# Altium PCB ProPrj_HTXStudio_OneHanded_Keyboard.PcbDoc (part 6 of 11)
Units mm, origin at the board's own origin, x right, y up, seen from the top; angles counter-clockwise.
Board outline 152.4 x 101.6 mm, 20 copper layers (F.Cu, F.Mask, B.Cu, B.Mask, In1.Cu, F.SilkS, In2.Cu, B.SilkS, F.Adhes, B.Adhes, F.Paste, B.Paste, Dwgs.User, Cmts.User, Eco1.User, Eco2.User, Edge.Cuts, Margin, B.CrtYd, F.CrtYd); 269 components, 0 nets, 747 pads, 1168 vias.
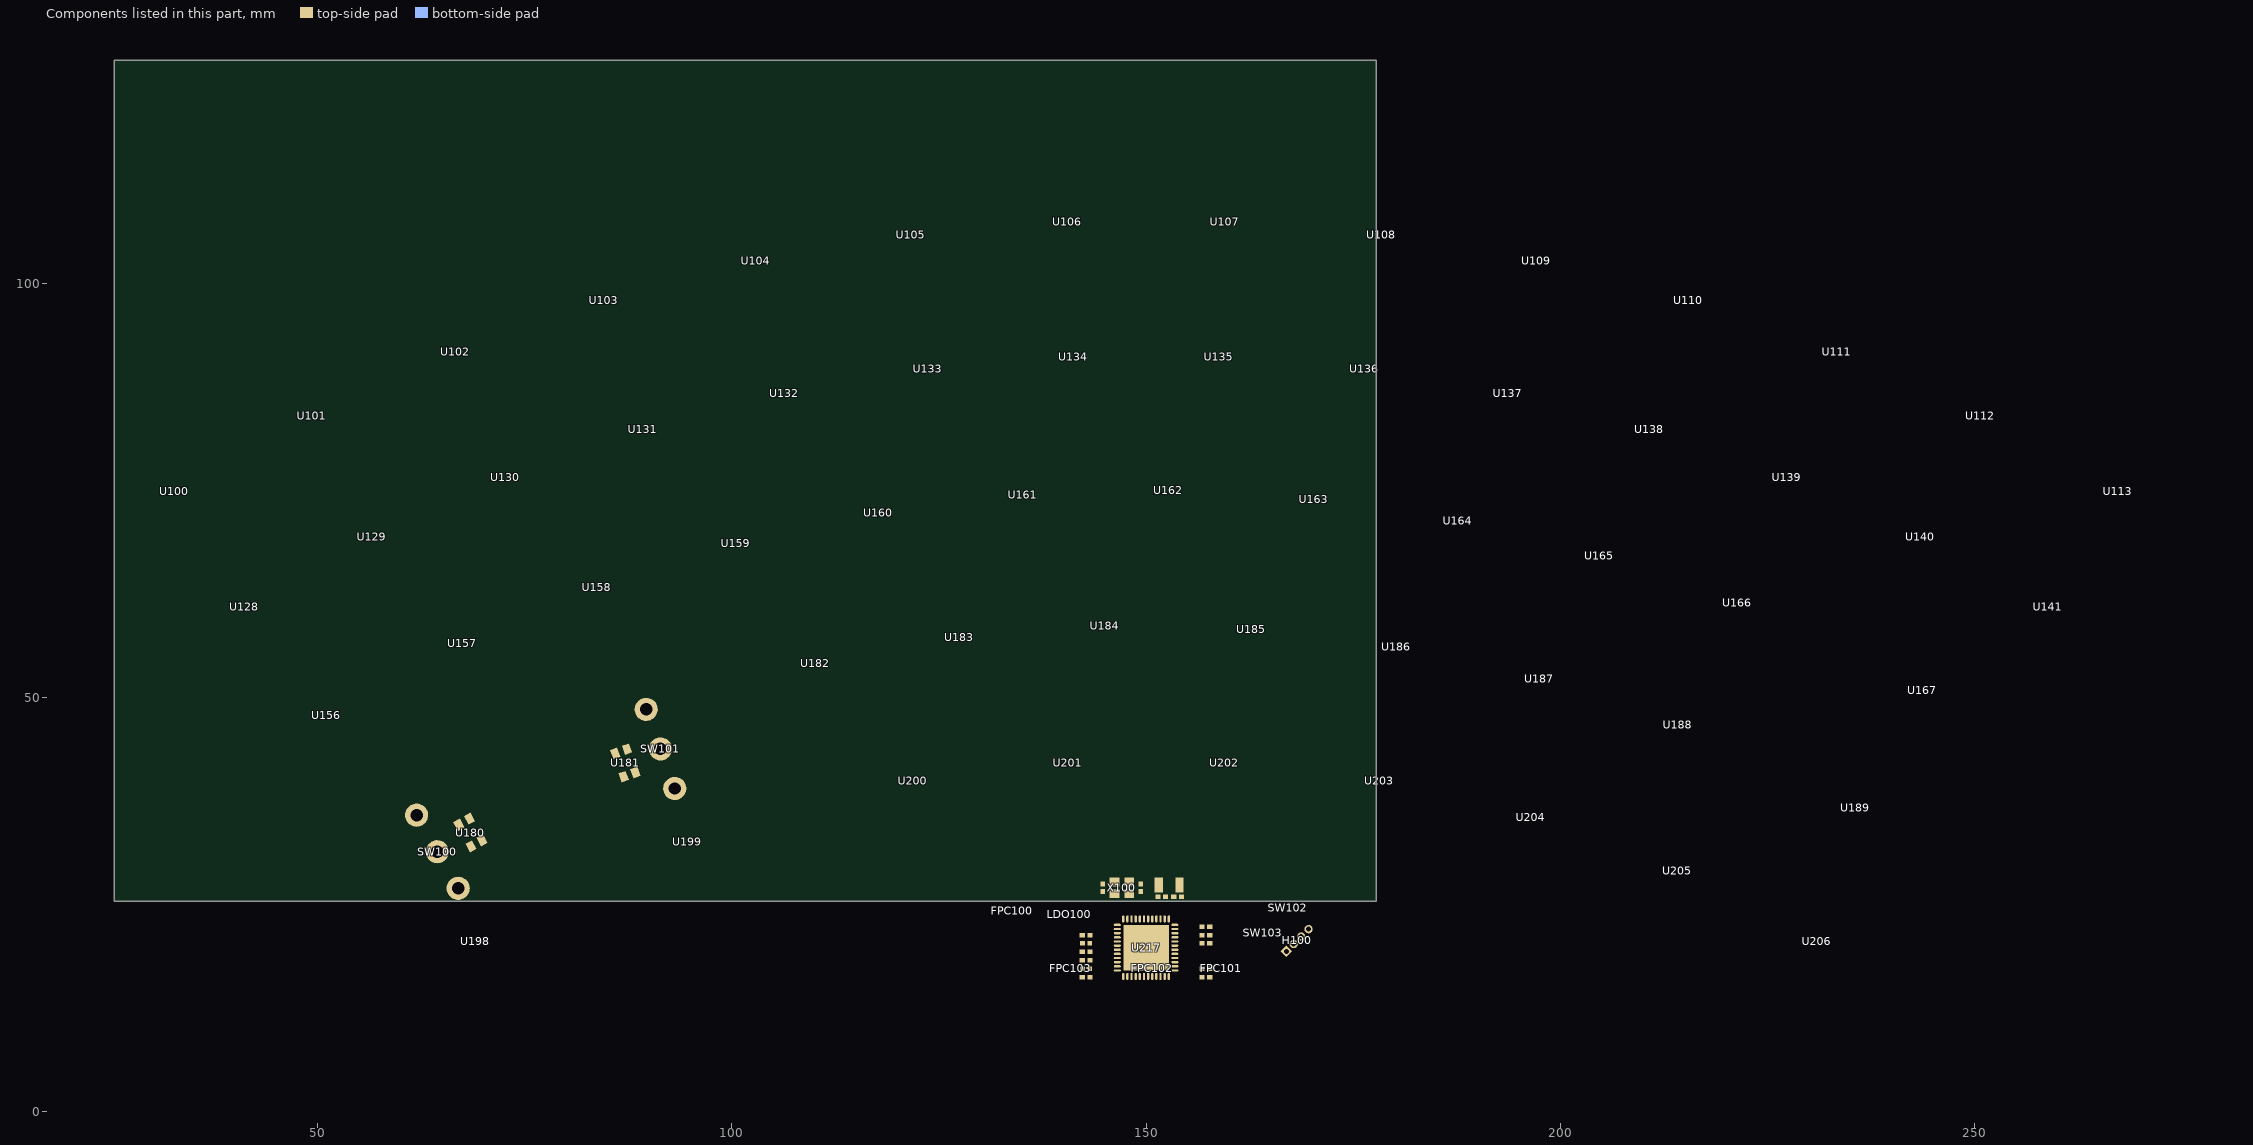
[diagram p18: the components of this part, seen from the top]

## Design rules (kind name [scope] priority, off if disabled: settings) (continued)
PolygonConnect Polygon_B.Cu--21_ConnectDirect [IsNamedPolygon('B.Cu--21') vs IsVia] p1009: connectstyle=Direct reliefconductorwidth=0.254 reliefentries=4 polygonreliefangle="90 Angle" airgapwidth=0.254
PolygonConnect Polygon_B.Cu--21_ConnectRelief45 [IsNamedPolygon('B.Cu--21') vs (IsThruPin or IsSMTPin) and (PadShape_AllLayers = 'Round')] p1010: connectstyle=Relief reliefconductorwidth=0.254 reliefentries=4 polygonreliefangle="45 Angle" airgapwidth=0.254
PolygonConnect Polygon_B.Cu--21_ConnectRelief90 [IsNamedPolygon('B.Cu--21') vs (IsThruPin or IsSMTPin) and (PadShape_AllLayers <> 'Round')] p1011: connectstyle=Relief reliefconductorwidth=0.254 reliefentries=4 polygonreliefangle="90 Angle" airgapwidth=0.254
PolygonConnect Polygon_B.Cu--20_ConnectDirect [IsNamedPolygon('B.Cu--20') vs IsVia] p1012: connectstyle=Direct reliefconductorwidth=0.254 reliefentries=4 polygonreliefangle="90 Angle" airgapwidth=0.254
PolygonConnect Polygon_B.Cu--20_ConnectRelief45 [IsNamedPolygon('B.Cu--20') vs (IsThruPin or IsSMTPin) and (PadShape_AllLayers = 'Round')] p1013: connectstyle=Relief reliefconductorwidth=0.254 reliefentries=4 polygonreliefangle="45 Angle" airgapwidth=0.254
PolygonConnect Polygon_B.Cu--20_ConnectRelief90 [IsNamedPolygon('B.Cu--20') vs (IsThruPin or IsSMTPin) and (PadShape_AllLayers <> 'Round')] p1014: connectstyle=Relief reliefconductorwidth=0.254 reliefentries=4 polygonreliefangle="90 Angle" airgapwidth=0.254
PolygonConnect Polygon_B.Cu--19_ConnectDirect [IsNamedPolygon('B.Cu--19') vs IsVia] p1015: connectstyle=Direct reliefconductorwidth=0.254 reliefentries=4 polygonreliefangle="90 Angle" airgapwidth=0.254
PolygonConnect Polygon_B.Cu--19_ConnectRelief45 [IsNamedPolygon('B.Cu--19') vs (IsThruPin or IsSMTPin) and (PadShape_AllLayers = 'Round')] p1016: connectstyle=Relief reliefconductorwidth=0.254 reliefentries=4 polygonreliefangle="45 Angle" airgapwidth=0.254
PolygonConnect Polygon_B.Cu--19_ConnectRelief90 [IsNamedPolygon('B.Cu--19') vs (IsThruPin or IsSMTPin) and (PadShape_AllLayers <> 'Round')] p1017: connectstyle=Relief reliefconductorwidth=0.254 reliefentries=4 polygonreliefangle="90 Angle" airgapwidth=0.254
PolygonConnect Polygon_B.Cu--18_ConnectDirect [IsNamedPolygon('B.Cu--18') vs IsVia] p1018: connectstyle=Direct reliefconductorwidth=0.254 reliefentries=4 polygonreliefangle="90 Angle" airgapwidth=0.254
PolygonConnect Polygon_B.Cu--18_ConnectRelief45 [IsNamedPolygon('B.Cu--18') vs (IsThruPin or IsSMTPin) and (PadShape_AllLayers = 'Round')] p1019: connectstyle=Relief reliefconductorwidth=0.254 reliefentries=4 polygonreliefangle="45 Angle" airgapwidth=0.254
PolygonConnect Polygon_B.Cu--18_ConnectRelief90 [IsNamedPolygon('B.Cu--18') vs (IsThruPin or IsSMTPin) and (PadShape_AllLayers <> 'Round')] p1020: connectstyle=Relief reliefconductorwidth=0.254 reliefentries=4 polygonreliefangle="90 Angle" airgapwidth=0.254
PolygonConnect Polygon_B.Cu--17_ConnectDirect [IsNamedPolygon('B.Cu--17') vs IsVia] p1021: connectstyle=Direct reliefconductorwidth=0.254 reliefentries=4 polygonreliefangle="90 Angle" airgapwidth=0.254
PolygonConnect Polygon_B.Cu--17_ConnectRelief45 [IsNamedPolygon('B.Cu--17') vs (IsThruPin or IsSMTPin) and (PadShape_AllLayers = 'Round')] p1022: connectstyle=Relief reliefconductorwidth=0.254 reliefentries=4 polygonreliefangle="45 Angle" airgapwidth=0.254
PolygonConnect Polygon_B.Cu--17_ConnectRelief90 [IsNamedPolygon('B.Cu--17') vs (IsThruPin or IsSMTPin) and (PadShape_AllLayers <> 'Round')] p1023: connectstyle=Relief reliefconductorwidth=0.254 reliefentries=4 polygonreliefangle="90 Angle" airgapwidth=0.254
PolygonConnect Polygon_B.Cu--16_ConnectDirect [IsNamedPolygon('B.Cu--16') vs IsVia] p1024: connectstyle=Direct reliefconductorwidth=0.254 reliefentries=4 polygonreliefangle="90 Angle" airgapwidth=0.254
PolygonConnect Polygon_B.Cu--16_ConnectRelief45 [IsNamedPolygon('B.Cu--16') vs (IsThruPin or IsSMTPin) and (PadShape_AllLayers = 'Round')] p1025: connectstyle=Relief reliefconductorwidth=0.254 reliefentries=4 polygonreliefangle="45 Angle" airgapwidth=0.254
PolygonConnect Polygon_B.Cu--16_ConnectRelief90 [IsNamedPolygon('B.Cu--16') vs (IsThruPin or IsSMTPin) and (PadShape_AllLayers <> 'Round')] p1026: connectstyle=Relief reliefconductorwidth=0.254 reliefentries=4 polygonreliefangle="90 Angle" airgapwidth=0.254
PolygonConnect Polygon_B.Cu--15_ConnectDirect [IsNamedPolygon('B.Cu--15') vs IsVia] p1027: connectstyle=Direct reliefconductorwidth=0.254 reliefentries=4 polygonreliefangle="90 Angle" airgapwidth=0.254
PolygonConnect Polygon_B.Cu--15_ConnectRelief45 [IsNamedPolygon('B.Cu--15') vs (IsThruPin or IsSMTPin) and (PadShape_AllLayers = 'Round')] p1028: connectstyle=Relief reliefconductorwidth=0.254 reliefentries=4 polygonreliefangle="45 Angle" airgapwidth=0.254
PolygonConnect Polygon_B.Cu--15_ConnectRelief90 [IsNamedPolygon('B.Cu--15') vs (IsThruPin or IsSMTPin) and (PadShape_AllLayers <> 'Round')] p1029: connectstyle=Relief reliefconductorwidth=0.254 reliefentries=4 polygonreliefangle="90 Angle" airgapwidth=0.254
PolygonConnect Polygon_B.Cu--14_ConnectDirect [IsNamedPolygon('B.Cu--14') vs IsVia] p1030: connectstyle=Direct reliefconductorwidth=0.254 reliefentries=4 polygonreliefangle="90 Angle" airgapwidth=0.254
PolygonConnect Polygon_B.Cu--14_ConnectRelief45 [IsNamedPolygon('B.Cu--14') vs (IsThruPin or IsSMTPin) and (PadShape_AllLayers = 'Round')] p1031: connectstyle=Relief reliefconductorwidth=0.254 reliefentries=4 polygonreliefangle="45 Angle" airgapwidth=0.254
PolygonConnect Polygon_B.Cu--14_ConnectRelief90 [IsNamedPolygon('B.Cu--14') vs (IsThruPin or IsSMTPin) and (PadShape_AllLayers <> 'Round')] p1032: connectstyle=Relief reliefconductorwidth=0.254 reliefentries=4 polygonreliefangle="90 Angle" airgapwidth=0.254
PolygonConnect Polygon_B.Cu--13_ConnectDirect [IsNamedPolygon('B.Cu--13') vs IsVia] p1033: connectstyle=Direct reliefconductorwidth=0.254 reliefentries=4 polygonreliefangle="90 Angle" airgapwidth=0.254
PolygonConnect Polygon_B.Cu--13_ConnectRelief45 [IsNamedPolygon('B.Cu--13') vs (IsThruPin or IsSMTPin) and (PadShape_AllLayers = 'Round')] p1034: connectstyle=Relief reliefconductorwidth=0.254 reliefentries=4 polygonreliefangle="45 Angle" airgapwidth=0.254
PolygonConnect Polygon_B.Cu--13_ConnectRelief90 [IsNamedPolygon('B.Cu--13') vs (IsThruPin or IsSMTPin) and (PadShape_AllLayers <> 'Round')] p1035: connectstyle=Relief reliefconductorwidth=0.254 reliefentries=4 polygonreliefangle="90 Angle" airgapwidth=0.254
PolygonConnect Polygon_B.Cu--12_ConnectDirect [IsNamedPolygon('B.Cu--12') vs IsVia] p1036: connectstyle=Direct reliefconductorwidth=0.254 reliefentries=4 polygonreliefangle="90 Angle" airgapwidth=0.254
PolygonConnect Polygon_B.Cu--12_ConnectRelief45 [IsNamedPolygon('B.Cu--12') vs (IsThruPin or IsSMTPin) and (PadShape_AllLayers = 'Round')] p1037: connectstyle=Relief reliefconductorwidth=0.254 reliefentries=4 polygonreliefangle="45 Angle" airgapwidth=0.254
PolygonConnect Polygon_B.Cu--12_ConnectRelief90 [IsNamedPolygon('B.Cu--12') vs (IsThruPin or IsSMTPin) and (PadShape_AllLayers <> 'Round')] p1038: connectstyle=Relief reliefconductorwidth=0.254 reliefentries=4 polygonreliefangle="90 Angle" airgapwidth=0.254
PolygonConnect Polygon_B.Cu--11_ConnectDirect [IsNamedPolygon('B.Cu--11') vs IsVia] p1039: connectstyle=Direct reliefconductorwidth=0.254 reliefentries=4 polygonreliefangle="90 Angle" airgapwidth=0.254
PolygonConnect Polygon_B.Cu--11_ConnectRelief45 [IsNamedPolygon('B.Cu--11') vs (IsThruPin or IsSMTPin) and (PadShape_AllLayers = 'Round')] p1040: connectstyle=Relief reliefconductorwidth=0.254 reliefentries=4 polygonreliefangle="45 Angle" airgapwidth=0.254
PolygonConnect Polygon_B.Cu--11_ConnectRelief90 [IsNamedPolygon('B.Cu--11') vs (IsThruPin or IsSMTPin) and (PadShape_AllLayers <> 'Round')] p1041: connectstyle=Relief reliefconductorwidth=0.254 reliefentries=4 polygonreliefangle="90 Angle" airgapwidth=0.254
PolygonConnect Polygon_B.Cu--10_ConnectDirect [IsNamedPolygon('B.Cu--10') vs IsVia] p1042: connectstyle=Direct reliefconductorwidth=0.254 reliefentries=4 polygonreliefangle="90 Angle" airgapwidth=0.254
PolygonConnect Polygon_B.Cu--10_ConnectRelief45 [IsNamedPolygon('B.Cu--10') vs (IsThruPin or IsSMTPin) and (PadShape_AllLayers = 'Round')] p1043: connectstyle=Relief reliefconductorwidth=0.254 reliefentries=4 polygonreliefangle="45 Angle" airgapwidth=0.254
PolygonConnect Polygon_B.Cu--10_ConnectRelief90 [IsNamedPolygon('B.Cu--10') vs (IsThruPin or IsSMTPin) and (PadShape_AllLayers <> 'Round')] p1044: connectstyle=Relief reliefconductorwidth=0.254 reliefentries=4 polygonreliefangle="90 Angle" airgapwidth=0.254
PolygonConnect Polygon_B.Cu--9_ConnectDirect [IsNamedPolygon('B.Cu--9') vs IsVia] p1045: connectstyle=Direct reliefconductorwidth=0.254 reliefentries=4 polygonreliefangle="90 Angle" airgapwidth=0.254
PolygonConnect Polygon_B.Cu--9_ConnectRelief45 [IsNamedPolygon('B.Cu--9') vs (IsThruPin or IsSMTPin) and (PadShape_AllLayers = 'Round')] p1046: connectstyle=Relief reliefconductorwidth=0.254 reliefentries=4 polygonreliefangle="45 Angle" airgapwidth=0.254
PolygonConnect Polygon_B.Cu--9_ConnectRelief90 [IsNamedPolygon('B.Cu--9') vs (IsThruPin or IsSMTPin) and (PadShape_AllLayers <> 'Round')] p1047: connectstyle=Relief reliefconductorwidth=0.254 reliefentries=4 polygonreliefangle="90 Angle" airgapwidth=0.254
PolygonConnect Polygon_B.Cu--8_ConnectDirect [IsNamedPolygon('B.Cu--8') vs IsVia] p1048: connectstyle=Direct reliefconductorwidth=0.254 reliefentries=4 polygonreliefangle="90 Angle" airgapwidth=0.254
PolygonConnect Polygon_B.Cu--8_ConnectRelief45 [IsNamedPolygon('B.Cu--8') vs (IsThruPin or IsSMTPin) and (PadShape_AllLayers = 'Round')] p1049: connectstyle=Relief reliefconductorwidth=0.254 reliefentries=4 polygonreliefangle="45 Angle" airgapwidth=0.254
PolygonConnect Polygon_B.Cu--8_ConnectRelief90 [IsNamedPolygon('B.Cu--8') vs (IsThruPin or IsSMTPin) and (PadShape_AllLayers <> 'Round')] p1050: connectstyle=Relief reliefconductorwidth=0.254 reliefentries=4 polygonreliefangle="90 Angle" airgapwidth=0.254
PolygonConnect Polygon_B.Cu--7_ConnectDirect [IsNamedPolygon('B.Cu--7') vs IsVia] p1051: connectstyle=Direct reliefconductorwidth=0.254 reliefentries=4 polygonreliefangle="90 Angle" airgapwidth=0.254
PolygonConnect Polygon_B.Cu--7_ConnectRelief45 [IsNamedPolygon('B.Cu--7') vs (IsThruPin or IsSMTPin) and (PadShape_AllLayers = 'Round')] p1052: connectstyle=Relief reliefconductorwidth=0.254 reliefentries=4 polygonreliefangle="45 Angle" airgapwidth=0.254
PolygonConnect Polygon_B.Cu--7_ConnectRelief90 [IsNamedPolygon('B.Cu--7') vs (IsThruPin or IsSMTPin) and (PadShape_AllLayers <> 'Round')] p1053: connectstyle=Relief reliefconductorwidth=0.254 reliefentries=4 polygonreliefangle="90 Angle" airgapwidth=0.254
PolygonConnect Polygon_B.Cu--6_ConnectDirect [IsNamedPolygon('B.Cu--6') vs IsVia] p1054: connectstyle=Direct reliefconductorwidth=0.254 reliefentries=4 polygonreliefangle="90 Angle" airgapwidth=0.254
PolygonConnect Polygon_B.Cu--6_ConnectRelief45 [IsNamedPolygon('B.Cu--6') vs (IsThruPin or IsSMTPin) and (PadShape_AllLayers = 'Round')] p1055: connectstyle=Relief reliefconductorwidth=0.254 reliefentries=4 polygonreliefangle="45 Angle" airgapwidth=0.254
PolygonConnect Polygon_B.Cu--6_ConnectRelief90 [IsNamedPolygon('B.Cu--6') vs (IsThruPin or IsSMTPin) and (PadShape_AllLayers <> 'Round')] p1056: connectstyle=Relief reliefconductorwidth=0.254 reliefentries=4 polygonreliefangle="90 Angle" airgapwidth=0.254
PolygonConnect Polygon_B.Cu--5_ConnectDirect [IsNamedPolygon('B.Cu--5') vs IsVia] p1057: connectstyle=Direct reliefconductorwidth=0.254 reliefentries=4 polygonreliefangle="90 Angle" airgapwidth=0.254
PolygonConnect Polygon_B.Cu--5_ConnectRelief45 [IsNamedPolygon('B.Cu--5') vs (IsThruPin or IsSMTPin) and (PadShape_AllLayers = 'Round')] p1058: connectstyle=Relief reliefconductorwidth=0.254 reliefentries=4 polygonreliefangle="45 Angle" airgapwidth=0.254
PolygonConnect Polygon_B.Cu--5_ConnectRelief90 [IsNamedPolygon('B.Cu--5') vs (IsThruPin or IsSMTPin) and (PadShape_AllLayers <> 'Round')] p1059: connectstyle=Relief reliefconductorwidth=0.254 reliefentries=4 polygonreliefangle="90 Angle" airgapwidth=0.254
PolygonConnect Polygon_B.Cu--4_ConnectDirect [IsNamedPolygon('B.Cu--4') vs IsVia] p1060: connectstyle=Direct reliefconductorwidth=0.254 reliefentries=4 polygonreliefangle="90 Angle" airgapwidth=0.254
PolygonConnect Polygon_B.Cu--4_ConnectRelief45 [IsNamedPolygon('B.Cu--4') vs (IsThruPin or IsSMTPin) and (PadShape_AllLayers = 'Round')] p1061: connectstyle=Relief reliefconductorwidth=0.254 reliefentries=4 polygonreliefangle="45 Angle" airgapwidth=0.254
PolygonConnect Polygon_B.Cu--4_ConnectRelief90 [IsNamedPolygon('B.Cu--4') vs (IsThruPin or IsSMTPin) and (PadShape_AllLayers <> 'Round')] p1062: connectstyle=Relief reliefconductorwidth=0.254 reliefentries=4 polygonreliefangle="90 Angle" airgapwidth=0.254
PolygonConnect Polygon_B.Cu--3_ConnectDirect [IsNamedPolygon('B.Cu--3') vs IsVia] p1063: connectstyle=Direct reliefconductorwidth=0.254 reliefentries=4 polygonreliefangle="90 Angle" airgapwidth=0.254
PolygonConnect Polygon_B.Cu--3_ConnectRelief45 [IsNamedPolygon('B.Cu--3') vs (IsThruPin or IsSMTPin) and (PadShape_AllLayers = 'Round')] p1064: connectstyle=Relief reliefconductorwidth=0.254 reliefentries=4 polygonreliefangle="45 Angle" airgapwidth=0.254
PolygonConnect Polygon_B.Cu--3_ConnectRelief90 [IsNamedPolygon('B.Cu--3') vs (IsThruPin or IsSMTPin) and (PadShape_AllLayers <> 'Round')] p1065: connectstyle=Relief reliefconductorwidth=0.254 reliefentries=4 polygonreliefangle="90 Angle" airgapwidth=0.254
PolygonConnect Polygon_B.Cu--2_ConnectDirect [IsNamedPolygon('B.Cu--2') vs IsVia] p1066: connectstyle=Direct reliefconductorwidth=0.254 reliefentries=4 polygonreliefangle="90 Angle" airgapwidth=0.254
PolygonConnect Polygon_B.Cu--2_ConnectRelief45 [IsNamedPolygon('B.Cu--2') vs (IsThruPin or IsSMTPin) and (PadShape_AllLayers = 'Round')] p1067: connectstyle=Relief reliefconductorwidth=0.254 reliefentries=4 polygonreliefangle="45 Angle" airgapwidth=0.254
PolygonConnect Polygon_B.Cu--2_ConnectRelief90 [IsNamedPolygon('B.Cu--2') vs (IsThruPin or IsSMTPin) and (PadShape_AllLayers <> 'Round')] p1068: connectstyle=Relief reliefconductorwidth=0.254 reliefentries=4 polygonreliefangle="90 Angle" airgapwidth=0.254
PolygonConnect Polygon_B.Cu--1_ConnectDirect [IsNamedPolygon('B.Cu--1') vs IsVia] p1069: connectstyle=Direct reliefconductorwidth=0.254 reliefentries=4 polygonreliefangle="90 Angle" airgapwidth=0.254
PolygonConnect Polygon_B.Cu--1_ConnectRelief45 [IsNamedPolygon('B.Cu--1') vs (IsThruPin or IsSMTPin) and (PadShape_AllLayers = 'Round')] p1070: connectstyle=Relief reliefconductorwidth=0.254 reliefentries=4 polygonreliefangle="45 Angle" airgapwidth=0.254
PolygonConnect Polygon_B.Cu--1_ConnectRelief90 [IsNamedPolygon('B.Cu--1') vs (IsThruPin or IsSMTPin) and (PadShape_AllLayers <> 'Round')] p1071: connectstyle=Relief reliefconductorwidth=0.254 reliefentries=4 polygonreliefangle="90 Angle" airgapwidth=0.254
PolygonConnect Polygon_B.Cu-_ConnectDirect [IsNamedPolygon('B.Cu-') vs IsVia] p1072: connectstyle=Direct reliefconductorwidth=0.254 reliefentries=4 polygonreliefangle="90 Angle" airgapwidth=0.254
PolygonConnect Polygon_B.Cu-_ConnectRelief45 [IsNamedPolygon('B.Cu-') vs (IsThruPin or IsSMTPin) and (PadShape_AllLayers = 'Round')] p1073: connectstyle=Relief reliefconductorwidth=0.254 reliefentries=4 polygonreliefangle="45 Angle" airgapwidth=0.254
PolygonConnect Polygon_B.Cu-_ConnectRelief90 [IsNamedPolygon('B.Cu-') vs (IsThruPin or IsSMTPin) and (PadShape_AllLayers <> 'Round')] p1074: connectstyle=Relief reliefconductorwidth=0.254 reliefentries=4 polygonreliefangle="90 Angle" airgapwidth=0.254
PolygonConnect Polygon_F.Cu--49_ConnectDirect [IsNamedPolygon('F.Cu--49') vs IsVia] p1075: connectstyle=Direct reliefconductorwidth=0.254 reliefentries=4 polygonreliefangle="90 Angle" airgapwidth=0.254
PolygonConnect Polygon_F.Cu--49_ConnectRelief45 [IsNamedPolygon('F.Cu--49') vs (IsThruPin or IsSMTPin) and (PadShape_AllLayers = 'Round')] p1076: connectstyle=Relief reliefconductorwidth=0.254 reliefentries=4 polygonreliefangle="45 Angle" airgapwidth=0.254
PolygonConnect Polygon_F.Cu--49_ConnectRelief90 [IsNamedPolygon('F.Cu--49') vs (IsThruPin or IsSMTPin) and (PadShape_AllLayers <> 'Round')] p1077: connectstyle=Relief reliefconductorwidth=0.254 reliefentries=4 polygonreliefangle="90 Angle" airgapwidth=0.254
PolygonConnect Polygon_F.Cu--48_ConnectDirect [IsNamedPolygon('F.Cu--48') vs IsVia] p1078: connectstyle=Direct reliefconductorwidth=0.254 reliefentries=4 polygonreliefangle="90 Angle" airgapwidth=0.254
PolygonConnect Polygon_F.Cu--48_ConnectRelief45 [IsNamedPolygon('F.Cu--48') vs (IsThruPin or IsSMTPin) and (PadShape_AllLayers = 'Round')] p1079: connectstyle=Relief reliefconductorwidth=0.254 reliefentries=4 polygonreliefangle="45 Angle" airgapwidth=0.254
PolygonConnect Polygon_F.Cu--48_ConnectRelief90 [IsNamedPolygon('F.Cu--48') vs (IsThruPin or IsSMTPin) and (PadShape_AllLayers <> 'Round')] p1080: connectstyle=Relief reliefconductorwidth=0.254 reliefentries=4 polygonreliefangle="90 Angle" airgapwidth=0.254
PolygonConnect Polygon_F.Cu--47_ConnectDirect [IsNamedPolygon('F.Cu--47') vs IsVia] p1081: connectstyle=Direct reliefconductorwidth=0.254 reliefentries=4 polygonreliefangle="90 Angle" airgapwidth=0.254
PolygonConnect Polygon_F.Cu--47_ConnectRelief45 [IsNamedPolygon('F.Cu--47') vs (IsThruPin or IsSMTPin) and (PadShape_AllLayers = 'Round')] p1082: connectstyle=Relief reliefconductorwidth=0.254 reliefentries=4 polygonreliefangle="45 Angle" airgapwidth=0.254
PolygonConnect Polygon_F.Cu--47_ConnectRelief90 [IsNamedPolygon('F.Cu--47') vs (IsThruPin or IsSMTPin) and (PadShape_AllLayers <> 'Round')] p1083: connectstyle=Relief reliefconductorwidth=0.254 reliefentries=4 polygonreliefangle="90 Angle" airgapwidth=0.254
PolygonConnect Polygon_F.Cu--46_ConnectDirect [IsNamedPolygon('F.Cu--46') vs IsVia] p1084: connectstyle=Direct reliefconductorwidth=0.254 reliefentries=4 polygonreliefangle="90 Angle" airgapwidth=0.254
PolygonConnect Polygon_F.Cu--46_ConnectRelief45 [IsNamedPolygon('F.Cu--46') vs (IsThruPin or IsSMTPin) and (PadShape_AllLayers = 'Round')] p1085: connectstyle=Relief reliefconductorwidth=0.254 reliefentries=4 polygonreliefangle="45 Angle" airgapwidth=0.254
PolygonConnect Polygon_F.Cu--46_ConnectRelief90 [IsNamedPolygon('F.Cu--46') vs (IsThruPin or IsSMTPin) and (PadShape_AllLayers <> 'Round')] p1086: connectstyle=Relief reliefconductorwidth=0.254 reliefentries=4 polygonreliefangle="90 Angle" airgapwidth=0.254
PolygonConnect Polygon_F.Cu--45_ConnectDirect [IsNamedPolygon('F.Cu--45') vs IsVia] p1087: connectstyle=Direct reliefconductorwidth=0.254 reliefentries=4 polygonreliefangle="90 Angle" airgapwidth=0.254
PolygonConnect Polygon_F.Cu--45_ConnectRelief45 [IsNamedPolygon('F.Cu--45') vs (IsThruPin or IsSMTPin) and (PadShape_AllLayers = 'Round')] p1088: connectstyle=Relief reliefconductorwidth=0.254 reliefentries=4 polygonreliefangle="45 Angle" airgapwidth=0.254
PolygonConnect Polygon_F.Cu--45_ConnectRelief90 [IsNamedPolygon('F.Cu--45') vs (IsThruPin or IsSMTPin) and (PadShape_AllLayers <> 'Round')] p1089: connectstyle=Relief reliefconductorwidth=0.254 reliefentries=4 polygonreliefangle="90 Angle" airgapwidth=0.254
PolygonConnect Polygon_F.Cu--44_ConnectDirect [IsNamedPolygon('F.Cu--44') vs IsVia] p1090: connectstyle=Direct reliefconductorwidth=0.254 reliefentries=4 polygonreliefangle="90 Angle" airgapwidth=0.254
PolygonConnect Polygon_F.Cu--44_ConnectRelief45 [IsNamedPolygon('F.Cu--44') vs (IsThruPin or IsSMTPin) and (PadShape_AllLayers = 'Round')] p1091: connectstyle=Relief reliefconductorwidth=0.254 reliefentries=4 polygonreliefangle="45 Angle" airgapwidth=0.254
PolygonConnect Polygon_F.Cu--44_ConnectRelief90 [IsNamedPolygon('F.Cu--44') vs (IsThruPin or IsSMTPin) and (PadShape_AllLayers <> 'Round')] p1092: connectstyle=Relief reliefconductorwidth=0.254 reliefentries=4 polygonreliefangle="90 Angle" airgapwidth=0.254
PolygonConnect Polygon_F.Cu--43_ConnectDirect [IsNamedPolygon('F.Cu--43') vs IsVia] p1093: connectstyle=Direct reliefconductorwidth=0.254 reliefentries=4 polygonreliefangle="90 Angle" airgapwidth=0.254
PolygonConnect Polygon_F.Cu--43_ConnectRelief45 [IsNamedPolygon('F.Cu--43') vs (IsThruPin or IsSMTPin) and (PadShape_AllLayers = 'Round')] p1094: connectstyle=Relief reliefconductorwidth=0.254 reliefentries=4 polygonreliefangle="45 Angle" airgapwidth=0.254
PolygonConnect Polygon_F.Cu--43_ConnectRelief90 [IsNamedPolygon('F.Cu--43') vs (IsThruPin or IsSMTPin) and (PadShape_AllLayers <> 'Round')] p1095: connectstyle=Relief reliefconductorwidth=0.254 reliefentries=4 polygonreliefangle="90 Angle" airgapwidth=0.254
PolygonConnect Polygon_F.Cu--42_ConnectDirect [IsNamedPolygon('F.Cu--42') vs IsVia] p1096: connectstyle=Direct reliefconductorwidth=0.254 reliefentries=4 polygonreliefangle="90 Angle" airgapwidth=0.254
PolygonConnect Polygon_F.Cu--42_ConnectRelief45 [IsNamedPolygon('F.Cu--42') vs (IsThruPin or IsSMTPin) and (PadShape_AllLayers = 'Round')] p1097: connectstyle=Relief reliefconductorwidth=0.254 reliefentries=4 polygonreliefangle="45 Angle" airgapwidth=0.254
PolygonConnect Polygon_F.Cu--42_ConnectRelief90 [IsNamedPolygon('F.Cu--42') vs (IsThruPin or IsSMTPin) and (PadShape_AllLayers <> 'Round')] p1098: connectstyle=Relief reliefconductorwidth=0.254 reliefentries=4 polygonreliefangle="90 Angle" airgapwidth=0.254
PolygonConnect Polygon_F.Cu--41_ConnectDirect [IsNamedPolygon('F.Cu--41') vs IsVia] p1099: connectstyle=Direct reliefconductorwidth=0.254 reliefentries=4 polygonreliefangle="90 Angle" airgapwidth=0.254
PolygonConnect Polygon_F.Cu--41_ConnectRelief45 [IsNamedPolygon('F.Cu--41') vs (IsThruPin or IsSMTPin) and (PadShape_AllLayers = 'Round')] p1100: connectstyle=Relief reliefconductorwidth=0.254 reliefentries=4 polygonreliefangle="45 Angle" airgapwidth=0.254
PolygonConnect Polygon_F.Cu--41_ConnectRelief90 [IsNamedPolygon('F.Cu--41') vs (IsThruPin or IsSMTPin) and (PadShape_AllLayers <> 'Round')] p1101: connectstyle=Relief reliefconductorwidth=0.254 reliefentries=4 polygonreliefangle="90 Angle" airgapwidth=0.254
PolygonConnect Polygon_F.Cu--40_ConnectDirect [IsNamedPolygon('F.Cu--40') vs IsVia] p1102: connectstyle=Direct reliefconductorwidth=0.254 reliefentries=4 polygonreliefangle="90 Angle" airgapwidth=0.254
PolygonConnect Polygon_F.Cu--40_ConnectRelief45 [IsNamedPolygon('F.Cu--40') vs (IsThruPin or IsSMTPin) and (PadShape_AllLayers = 'Round')] p1103: connectstyle=Relief reliefconductorwidth=0.254 reliefentries=4 polygonreliefangle="45 Angle" airgapwidth=0.254
PolygonConnect Polygon_F.Cu--40_ConnectRelief90 [IsNamedPolygon('F.Cu--40') vs (IsThruPin or IsSMTPin) and (PadShape_AllLayers <> 'Round')] p1104: connectstyle=Relief reliefconductorwidth=0.254 reliefentries=4 polygonreliefangle="90 Angle" airgapwidth=0.254
PolygonConnect Polygon_F.Cu--39_ConnectDirect [IsNamedPolygon('F.Cu--39') vs IsVia] p1105: connectstyle=Direct reliefconductorwidth=0.254 reliefentries=4 polygonreliefangle="90 Angle" airgapwidth=0.254
PolygonConnect Polygon_F.Cu--39_ConnectRelief45 [IsNamedPolygon('F.Cu--39') vs (IsThruPin or IsSMTPin) and (PadShape_AllLayers = 'Round')] p1106: connectstyle=Relief reliefconductorwidth=0.254 reliefentries=4 polygonreliefangle="45 Angle" airgapwidth=0.254
PolygonConnect Polygon_F.Cu--39_ConnectRelief90 [IsNamedPolygon('F.Cu--39') vs (IsThruPin or IsSMTPin) and (PadShape_AllLayers <> 'Round')] p1107: connectstyle=Relief reliefconductorwidth=0.254 reliefentries=4 polygonreliefangle="90 Angle" airgapwidth=0.254
PolygonConnect Polygon_F.Cu--38_ConnectDirect [IsNamedPolygon('F.Cu--38') vs IsVia] p1108: connectstyle=Direct reliefconductorwidth=0.254 reliefentries=4 polygonreliefangle="90 Angle" airgapwidth=0.254
PolygonConnect Polygon_F.Cu--38_ConnectRelief45 [IsNamedPolygon('F.Cu--38') vs (IsThruPin or IsSMTPin) and (PadShape_AllLayers = 'Round')] p1109: connectstyle=Relief reliefconductorwidth=0.254 reliefentries=4 polygonreliefangle="45 Angle" airgapwidth=0.254
PolygonConnect Polygon_F.Cu--38_ConnectRelief90 [IsNamedPolygon('F.Cu--38') vs (IsThruPin or IsSMTPin) and (PadShape_AllLayers <> 'Round')] p1110: connectstyle=Relief reliefconductorwidth=0.254 reliefentries=4 polygonreliefangle="90 Angle" airgapwidth=0.254
PolygonConnect Polygon_F.Cu--37_ConnectDirect [IsNamedPolygon('F.Cu--37') vs IsVia] p1111: connectstyle=Direct reliefconductorwidth=0.254 reliefentries=4 polygonreliefangle="90 Angle" airgapwidth=0.254
PolygonConnect Polygon_F.Cu--37_ConnectRelief45 [IsNamedPolygon('F.Cu--37') vs (IsThruPin or IsSMTPin) and (PadShape_AllLayers = 'Round')] p1112: connectstyle=Relief reliefconductorwidth=0.254 reliefentries=4 polygonreliefangle="45 Angle" airgapwidth=0.254
PolygonConnect Polygon_F.Cu--37_ConnectRelief90 [IsNamedPolygon('F.Cu--37') vs (IsThruPin or IsSMTPin) and (PadShape_AllLayers <> 'Round')] p1113: connectstyle=Relief reliefconductorwidth=0.254 reliefentries=4 polygonreliefangle="90 Angle" airgapwidth=0.254
PolygonConnect Polygon_F.Cu--36_ConnectDirect [IsNamedPolygon('F.Cu--36') vs IsVia] p1114: connectstyle=Direct reliefconductorwidth=0.254 reliefentries=4 polygonreliefangle="90 Angle" airgapwidth=0.254
PolygonConnect Polygon_F.Cu--36_ConnectRelief45 [IsNamedPolygon('F.Cu--36') vs (IsThruPin or IsSMTPin) and (PadShape_AllLayers = 'Round')] p1115: connectstyle=Relief reliefconductorwidth=0.254 reliefentries=4 polygonreliefangle="45 Angle" airgapwidth=0.254
PolygonConnect Polygon_F.Cu--36_ConnectRelief90 [IsNamedPolygon('F.Cu--36') vs (IsThruPin or IsSMTPin) and (PadShape_AllLayers <> 'Round')] p1116: connectstyle=Relief reliefconductorwidth=0.254 reliefentries=4 polygonreliefangle="90 Angle" airgapwidth=0.254
PolygonConnect Polygon_F.Cu--35_ConnectDirect [IsNamedPolygon('F.Cu--35') vs IsVia] p1117: connectstyle=Direct reliefconductorwidth=0.254 reliefentries=4 polygonreliefangle="90 Angle" airgapwidth=0.254
PolygonConnect Polygon_F.Cu--35_ConnectRelief45 [IsNamedPolygon('F.Cu--35') vs (IsThruPin or IsSMTPin) and (PadShape_AllLayers = 'Round')] p1118: connectstyle=Relief reliefconductorwidth=0.254 reliefentries=4 polygonreliefangle="45 Angle" airgapwidth=0.254
PolygonConnect Polygon_F.Cu--35_ConnectRelief90 [IsNamedPolygon('F.Cu--35') vs (IsThruPin or IsSMTPin) and (PadShape_AllLayers <> 'Round')] p1119: connectstyle=Relief reliefconductorwidth=0.254 reliefentries=4 polygonreliefangle="90 Angle" airgapwidth=0.254
PolygonConnect Polygon_F.Cu--34_ConnectDirect [IsNamedPolygon('F.Cu--34') vs IsVia] p1120: connectstyle=Direct reliefconductorwidth=0.254 reliefentries=4 polygonreliefangle="90 Angle" airgapwidth=0.254
PolygonConnect Polygon_F.Cu--34_ConnectRelief45 [IsNamedPolygon('F.Cu--34') vs (IsThruPin or IsSMTPin) and (PadShape_AllLayers = 'Round')] p1121: connectstyle=Relief reliefconductorwidth=0.254 reliefentries=4 polygonreliefangle="45 Angle" airgapwidth=0.254
PolygonConnect Polygon_F.Cu--34_ConnectRelief90 [IsNamedPolygon('F.Cu--34') vs (IsThruPin or IsSMTPin) and (PadShape_AllLayers <> 'Round')] p1122: connectstyle=Relief reliefconductorwidth=0.254 reliefentries=4 polygonreliefangle="90 Angle" airgapwidth=0.254
PolygonConnect Polygon_F.Cu--33_ConnectDirect [IsNamedPolygon('F.Cu--33') vs IsVia] p1123: connectstyle=Direct reliefconductorwidth=0.254 reliefentries=4 polygonreliefangle="90 Angle" airgapwidth=0.254
PolygonConnect Polygon_F.Cu--33_ConnectRelief45 [IsNamedPolygon('F.Cu--33') vs (IsThruPin or IsSMTPin) and (PadShape_AllLayers = 'Round')] p1124: connectstyle=Relief reliefconductorwidth=0.254 reliefentries=4 polygonreliefangle="45 Angle" airgapwidth=0.254
PolygonConnect Polygon_F.Cu--33_ConnectRelief90 [IsNamedPolygon('F.Cu--33') vs (IsThruPin or IsSMTPin) and (PadShape_AllLayers <> 'Round')] p1125: connectstyle=Relief reliefconductorwidth=0.254 reliefentries=4 polygonreliefangle="90 Angle" airgapwidth=0.254
PolygonConnect Polygon_F.Cu--32_ConnectDirect [IsNamedPolygon('F.Cu--32') vs IsVia] p1126: connectstyle=Direct reliefconductorwidth=0.254 reliefentries=4 polygonreliefangle="90 Angle" airgapwidth=0.254
PolygonConnect Polygon_F.Cu--32_ConnectRelief45 [IsNamedPolygon('F.Cu--32') vs (IsThruPin or IsSMTPin) and (PadShape_AllLayers = 'Round')] p1127: connectstyle=Relief reliefconductorwidth=0.254 reliefentries=4 polygonreliefangle="45 Angle" airgapwidth=0.254
PolygonConnect Polygon_F.Cu--32_ConnectRelief90 [IsNamedPolygon('F.Cu--32') vs (IsThruPin or IsSMTPin) and (PadShape_AllLayers <> 'Round')] p1128: connectstyle=Relief reliefconductorwidth=0.254 reliefentries=4 polygonreliefangle="90 Angle" airgapwidth=0.254
PolygonConnect Polygon_F.Cu--31_ConnectDirect [IsNamedPolygon('F.Cu--31') vs IsVia] p1129: connectstyle=Direct reliefconductorwidth=0.254 reliefentries=4 polygonreliefangle="90 Angle" airgapwidth=0.254
PolygonConnect Polygon_F.Cu--31_ConnectRelief45 [IsNamedPolygon('F.Cu--31') vs (IsThruPin or IsSMTPin) and (PadShape_AllLayers = 'Round')] p1130: connectstyle=Relief reliefconductorwidth=0.254 reliefentries=4 polygonreliefangle="45 Angle" airgapwidth=0.254
PolygonConnect Polygon_F.Cu--31_ConnectRelief90 [IsNamedPolygon('F.Cu--31') vs (IsThruPin or IsSMTPin) and (PadShape_AllLayers <> 'Round')] p1131: connectstyle=Relief reliefconductorwidth=0.254 reliefentries=4 polygonreliefangle="90 Angle" airgapwidth=0.254
PolygonConnect Polygon_F.Cu--30_ConnectDirect [IsNamedPolygon('F.Cu--30') vs IsVia] p1132: connectstyle=Direct reliefconductorwidth=0.254 reliefentries=4 polygonreliefangle="90 Angle" airgapwidth=0.254
PolygonConnect Polygon_F.Cu--30_ConnectRelief45 [IsNamedPolygon('F.Cu--30') vs (IsThruPin or IsSMTPin) and (PadShape_AllLayers = 'Round')] p1133: connectstyle=Relief reliefconductorwidth=0.254 reliefentries=4 polygonreliefangle="45 Angle" airgapwidth=0.254
PolygonConnect Polygon_F.Cu--30_ConnectRelief90 [IsNamedPolygon('F.Cu--30') vs (IsThruPin or IsSMTPin) and (PadShape_AllLayers <> 'Round')] p1134: connectstyle=Relief reliefconductorwidth=0.254 reliefentries=4 polygonreliefangle="90 Angle" airgapwidth=0.254
PolygonConnect Polygon_F.Cu--29_ConnectDirect [IsNamedPolygon('F.Cu--29') vs IsVia] p1135: connectstyle=Direct reliefconductorwidth=0.254 reliefentries=4 polygonreliefangle="90 Angle" airgapwidth=0.254
PolygonConnect Polygon_F.Cu--29_ConnectRelief45 [IsNamedPolygon('F.Cu--29') vs (IsThruPin or IsSMTPin) and (PadShape_AllLayers = 'Round')] p1136: connectstyle=Relief reliefconductorwidth=0.254 reliefentries=4 polygonreliefangle="45 Angle" airgapwidth=0.254
PolygonConnect Polygon_F.Cu--29_ConnectRelief90 [IsNamedPolygon('F.Cu--29') vs (IsThruPin or IsSMTPin) and (PadShape_AllLayers <> 'Round')] p1137: connectstyle=Relief reliefconductorwidth=0.254 reliefentries=4 polygonreliefangle="90 Angle" airgapwidth=0.254
PolygonConnect Polygon_F.Cu--28_ConnectDirect [IsNamedPolygon('F.Cu--28') vs IsVia] p1138: connectstyle=Direct reliefconductorwidth=0.254 reliefentries=4 polygonreliefangle="90 Angle" airgapwidth=0.254
PolygonConnect Polygon_F.Cu--28_ConnectRelief45 [IsNamedPolygon('F.Cu--28') vs (IsThruPin or IsSMTPin) and (PadShape_AllLayers = 'Round')] p1139: connectstyle=Relief reliefconductorwidth=0.254 reliefentries=4 polygonreliefangle="45 Angle" airgapwidth=0.254
PolygonConnect Polygon_F.Cu--28_ConnectRelief90 [IsNamedPolygon('F.Cu--28') vs (IsThruPin or IsSMTPin) and (PadShape_AllLayers <> 'Round')] p1140: connectstyle=Relief reliefconductorwidth=0.254 reliefentries=4 polygonreliefangle="90 Angle" airgapwidth=0.254
PolygonConnect Polygon_F.Cu--27_ConnectDirect [IsNamedPolygon('F.Cu--27') vs IsVia] p1141: connectstyle=Direct reliefconductorwidth=0.254 reliefentries=4 polygonreliefangle="90 Angle" airgapwidth=0.254
PolygonConnect Polygon_F.Cu--27_ConnectRelief45 [IsNamedPolygon('F.Cu--27') vs (IsThruPin or IsSMTPin) and (PadShape_AllLayers = 'Round')] p1142: connectstyle=Relief reliefconductorwidth=0.254 reliefentries=4 polygonreliefangle="45 Angle" airgapwidth=0.254
PolygonConnect Polygon_F.Cu--27_ConnectRelief90 [IsNamedPolygon('F.Cu--27') vs (IsThruPin or IsSMTPin) and (PadShape_AllLayers <> 'Round')] p1143: connectstyle=Relief reliefconductorwidth=0.254 reliefentries=4 polygonreliefangle="90 Angle" airgapwidth=0.254
PolygonConnect Polygon_F.Cu--26_ConnectDirect [IsNamedPolygon('F.Cu--26') vs IsVia] p1144: connectstyle=Direct reliefconductorwidth=0.254 reliefentries=4 polygonreliefangle="90 Angle" airgapwidth=0.254
PolygonConnect Polygon_F.Cu--26_ConnectRelief45 [IsNamedPolygon('F.Cu--26') vs (IsThruPin or IsSMTPin) and (PadShape_AllLayers = 'Round')] p1145: connectstyle=Relief reliefconductorwidth=0.254 reliefentries=4 polygonreliefangle="45 Angle" airgapwidth=0.254
PolygonConnect Polygon_F.Cu--26_ConnectRelief90 [IsNamedPolygon('F.Cu--26') vs (IsThruPin or IsSMTPin) and (PadShape_AllLayers <> 'Round')] p1146: connectstyle=Relief reliefconductorwidth=0.254 reliefentries=4 polygonreliefangle="90 Angle" airgapwidth=0.254
PolygonConnect Polygon_F.Cu--25_ConnectDirect [IsNamedPolygon('F.Cu--25') vs IsVia] p1147: connectstyle=Direct reliefconductorwidth=0.254 reliefentries=4 polygonreliefangle="90 Angle" airgapwidth=0.254
PolygonConnect Polygon_F.Cu--25_ConnectRelief45 [IsNamedPolygon('F.Cu--25') vs (IsThruPin or IsSMTPin) and (PadShape_AllLayers = 'Round')] p1148: connectstyle=Relief reliefconductorwidth=0.254 reliefentries=4 polygonreliefangle="45 Angle" airgapwidth=0.254
PolygonConnect Polygon_F.Cu--25_ConnectRelief90 [IsNamedPolygon('F.Cu--25') vs (IsThruPin or IsSMTPin) and (PadShape_AllLayers <> 'Round')] p1149: connectstyle=Relief reliefconductorwidth=0.254 reliefentries=4 polygonreliefangle="90 Angle" airgapwidth=0.254
PolygonConnect Polygon_F.Cu--24_ConnectDirect [IsNamedPolygon('F.Cu--24') vs IsVia] p1150: connectstyle=Direct reliefconductorwidth=0.254 reliefentries=4 polygonreliefangle="90 Angle" airgapwidth=0.254
PolygonConnect Polygon_F.Cu--24_ConnectRelief45 [IsNamedPolygon('F.Cu--24') vs (IsThruPin or IsSMTPin) and (PadShape_AllLayers = 'Round')] p1151: connectstyle=Relief reliefconductorwidth=0.254 reliefentries=4 polygonreliefangle="45 Angle" airgapwidth=0.254
PolygonConnect Polygon_F.Cu--24_ConnectRelief90 [IsNamedPolygon('F.Cu--24') vs (IsThruPin or IsSMTPin) and (PadShape_AllLayers <> 'Round')] p1152: connectstyle=Relief reliefconductorwidth=0.254 reliefentries=4 polygonreliefangle="90 Angle" airgapwidth=0.254
PolygonConnect Polygon_F.Cu--23_ConnectDirect [IsNamedPolygon('F.Cu--23') vs IsVia] p1153: connectstyle=Direct reliefconductorwidth=0.254 reliefentries=4 polygonreliefangle="90 Angle" airgapwidth=0.254
PolygonConnect Polygon_F.Cu--23_ConnectRelief45 [IsNamedPolygon('F.Cu--23') vs (IsThruPin or IsSMTPin) and (PadShape_AllLayers = 'Round')] p1154: connectstyle=Relief reliefconductorwidth=0.254 reliefentries=4 polygonreliefangle="45 Angle" airgapwidth=0.254
PolygonConnect Polygon_F.Cu--23_ConnectRelief90 [IsNamedPolygon('F.Cu--23') vs (IsThruPin or IsSMTPin) and (PadShape_AllLayers <> 'Round')] p1155: connectstyle=Relief reliefconductorwidth=0.254 reliefentries=4 polygonreliefangle="90 Angle" airgapwidth=0.254
PolygonConnect Polygon_F.Cu--22_ConnectDirect [IsNamedPolygon('F.Cu--22') vs IsVia] p1156: connectstyle=Direct reliefconductorwidth=0.254 reliefentries=4 polygonreliefangle="90 Angle" airgapwidth=0.254
PolygonConnect Polygon_F.Cu--22_ConnectRelief45 [IsNamedPolygon('F.Cu--22') vs (IsThruPin or IsSMTPin) and (PadShape_AllLayers = 'Round')] p1157: connectstyle=Relief reliefconductorwidth=0.254 reliefentries=4 polygonreliefangle="45 Angle" airgapwidth=0.254
PolygonConnect Polygon_F.Cu--22_ConnectRelief90 [IsNamedPolygon('F.Cu--22') vs (IsThruPin or IsSMTPin) and (PadShape_AllLayers <> 'Round')] p1158: connectstyle=Relief reliefconductorwidth=0.254 reliefentries=4 polygonreliefangle="90 Angle" airgapwidth=0.254
PolygonConnect Polygon_F.Cu--21_ConnectDirect [IsNamedPolygon('F.Cu--21') vs IsVia] p1159: connectstyle=Direct reliefconductorwidth=0.254 reliefentries=4 polygonreliefangle="90 Angle" airgapwidth=0.254
PolygonConnect Polygon_F.Cu--21_ConnectRelief45 [IsNamedPolygon('F.Cu--21') vs (IsThruPin or IsSMTPin) and (PadShape_AllLayers = 'Round')] p1160: connectstyle=Relief reliefconductorwidth=0.254 reliefentries=4 polygonreliefangle="45 Angle" airgapwidth=0.254
PolygonConnect Polygon_F.Cu--21_ConnectRelief90 [IsNamedPolygon('F.Cu--21') vs (IsThruPin or IsSMTPin) and (PadShape_AllLayers <> 'Round')] p1161: connectstyle=Relief reliefconductorwidth=0.254 reliefentries=4 polygonreliefangle="90 Angle" airgapwidth=0.254
PolygonConnect Polygon_F.Cu--20_ConnectDirect [IsNamedPolygon('F.Cu--20') vs IsVia] p1162: connectstyle=Direct reliefconductorwidth=0.254 reliefentries=4 polygonreliefangle="90 Angle" airgapwidth=0.254
PolygonConnect Polygon_F.Cu--20_ConnectRelief45 [IsNamedPolygon('F.Cu--20') vs (IsThruPin or IsSMTPin) and (PadShape_AllLayers = 'Round')] p1163: connectstyle=Relief reliefconductorwidth=0.254 reliefentries=4 polygonreliefangle="45 Angle" airgapwidth=0.254
PolygonConnect Polygon_F.Cu--20_ConnectRelief90 [IsNamedPolygon('F.Cu--20') vs (IsThruPin or IsSMTPin) and (PadShape_AllLayers <> 'Round')] p1164: connectstyle=Relief reliefconductorwidth=0.254 reliefentries=4 polygonreliefangle="90 Angle" airgapwidth=0.254
PolygonConnect Polygon_F.Cu--19_ConnectDirect [IsNamedPolygon('F.Cu--19') vs IsVia] p1165: connectstyle=Direct reliefconductorwidth=0.254 reliefentries=4 polygonreliefangle="90 Angle" airgapwidth=0.254
PolygonConnect Polygon_F.Cu--19_ConnectRelief45 [IsNamedPolygon('F.Cu--19') vs (IsThruPin or IsSMTPin) and (PadShape_AllLayers = 'Round')] p1166: connectstyle=Relief reliefconductorwidth=0.254 reliefentries=4 polygonreliefangle="45 Angle" airgapwidth=0.254
PolygonConnect Polygon_F.Cu--19_ConnectRelief90 [IsNamedPolygon('F.Cu--19') vs (IsThruPin or IsSMTPin) and (PadShape_AllLayers <> 'Round')] p1167: connectstyle=Relief reliefconductorwidth=0.254 reliefentries=4 polygonreliefangle="90 Angle" airgapwidth=0.254
PolygonConnect Polygon_F.Cu--18_ConnectDirect [IsNamedPolygon('F.Cu--18') vs IsVia] p1168: connectstyle=Direct reliefconductorwidth=0.254 reliefentries=4 polygonreliefangle="90 Angle" airgapwidth=0.254
PolygonConnect Polygon_F.Cu--18_ConnectRelief45 [IsNamedPolygon('F.Cu--18') vs (IsThruPin or IsSMTPin) and (PadShape_AllLayers = 'Round')] p1169: connectstyle=Relief reliefconductorwidth=0.254 reliefentries=4 polygonreliefangle="45 Angle" airgapwidth=0.254
PolygonConnect Polygon_F.Cu--18_ConnectRelief90 [IsNamedPolygon('F.Cu--18') vs (IsThruPin or IsSMTPin) and (PadShape_AllLayers <> 'Round')] p1170: connectstyle=Relief reliefconductorwidth=0.254 reliefentries=4 polygonreliefangle="90 Angle" airgapwidth=0.254
PolygonConnect Polygon_F.Cu--17_ConnectDirect [IsNamedPolygon('F.Cu--17') vs IsVia] p1171: connectstyle=Direct reliefconductorwidth=0.254 reliefentries=4 polygonreliefangle="90 Angle" airgapwidth=0.254
PolygonConnect Polygon_F.Cu--17_ConnectRelief45 [IsNamedPolygon('F.Cu--17') vs (IsThruPin or IsSMTPin) and (PadShape_AllLayers = 'Round')] p1172: connectstyle=Relief reliefconductorwidth=0.254 reliefentries=4 polygonreliefangle="45 Angle" airgapwidth=0.254
PolygonConnect Polygon_F.Cu--17_ConnectRelief90 [IsNamedPolygon('F.Cu--17') vs (IsThruPin or IsSMTPin) and (PadShape_AllLayers <> 'Round')] p1173: connectstyle=Relief reliefconductorwidth=0.254 reliefentries=4 polygonreliefangle="90 Angle" airgapwidth=0.254
PolygonConnect Polygon_F.Cu--16_ConnectDirect [IsNamedPolygon('F.Cu--16') vs IsVia] p1174: connectstyle=Direct reliefconductorwidth=0.254 reliefentries=4 polygonreliefangle="90 Angle" airgapwidth=0.254
PolygonConnect Polygon_F.Cu--16_ConnectRelief45 [IsNamedPolygon('F.Cu--16') vs (IsThruPin or IsSMTPin) and (PadShape_AllLayers = 'Round')] p1175: connectstyle=Relief reliefconductorwidth=0.254 reliefentries=4 polygonreliefangle="45 Angle" airgapwidth=0.254
PolygonConnect Polygon_F.Cu--16_ConnectRelief90 [IsNamedPolygon('F.Cu--16') vs (IsThruPin or IsSMTPin) and (PadShape_AllLayers <> 'Round')] p1176: connectstyle=Relief reliefconductorwidth=0.254 reliefentries=4 polygonreliefangle="90 Angle" airgapwidth=0.254
PolygonConnect Polygon_F.Cu--15_ConnectDirect [IsNamedPolygon('F.Cu--15') vs IsVia] p1177: connectstyle=Direct reliefconductorwidth=0.254 reliefentries=4 polygonreliefangle="90 Angle" airgapwidth=0.254
PolygonConnect Polygon_F.Cu--15_ConnectRelief45 [IsNamedPolygon('F.Cu--15') vs (IsThruPin or IsSMTPin) and (PadShape_AllLayers = 'Round')] p1178: connectstyle=Relief reliefconductorwidth=0.254 reliefentries=4 polygonreliefangle="45 Angle" airgapwidth=0.254
PolygonConnect Polygon_F.Cu--15_ConnectRelief90 [IsNamedPolygon('F.Cu--15') vs (IsThruPin or IsSMTPin) and (PadShape_AllLayers <> 'Round')] p1179: connectstyle=Relief reliefconductorwidth=0.254 reliefentries=4 polygonreliefangle="90 Angle" airgapwidth=0.254
PolygonConnect Polygon_F.Cu--14_ConnectDirect [IsNamedPolygon('F.Cu--14') vs IsVia] p1180: connectstyle=Direct reliefconductorwidth=0.254 reliefentries=4 polygonreliefangle="90 Angle" airgapwidth=0.254
PolygonConnect Polygon_F.Cu--14_ConnectRelief45 [IsNamedPolygon('F.Cu--14') vs (IsThruPin or IsSMTPin) and (PadShape_AllLayers = 'Round')] p1181: connectstyle=Relief reliefconductorwidth=0.254 reliefentries=4 polygonreliefangle="45 Angle" airgapwidth=0.254
PolygonConnect Polygon_F.Cu--14_ConnectRelief90 [IsNamedPolygon('F.Cu--14') vs (IsThruPin or IsSMTPin) and (PadShape_AllLayers <> 'Round')] p1182: connectstyle=Relief reliefconductorwidth=0.254 reliefentries=4 polygonreliefangle="90 Angle" airgapwidth=0.254
PolygonConnect Polygon_F.Cu--13_ConnectDirect [IsNamedPolygon('F.Cu--13') vs IsVia] p1183: connectstyle=Direct reliefconductorwidth=0.254 reliefentries=4 polygonreliefangle="90 Angle" airgapwidth=0.254
PolygonConnect Polygon_F.Cu--13_ConnectRelief45 [IsNamedPolygon('F.Cu--13') vs (IsThruPin or IsSMTPin) and (PadShape_AllLayers = 'Round')] p1184: connectstyle=Relief reliefconductorwidth=0.254 reliefentries=4 polygonreliefangle="45 Angle" airgapwidth=0.254
PolygonConnect Polygon_F.Cu--13_ConnectRelief90 [IsNamedPolygon('F.Cu--13') vs (IsThruPin or IsSMTPin) and (PadShape_AllLayers <> 'Round')] p1185: connectstyle=Relief reliefconductorwidth=0.254 reliefentries=4 polygonreliefangle="90 Angle" airgapwidth=0.254
PolygonConnect Polygon_F.Cu--12_ConnectDirect [IsNamedPolygon('F.Cu--12') vs IsVia] p1186: connectstyle=Direct reliefconductorwidth=0.254 reliefentries=4 polygonreliefangle="90 Angle" airgapwidth=0.254
PolygonConnect Polygon_F.Cu--12_ConnectRelief45 [IsNamedPolygon('F.Cu--12') vs (IsThruPin or IsSMTPin) and (PadShape_AllLayers = 'Round')] p1187: connectstyle=Relief reliefconductorwidth=0.254 reliefentries=4 polygonreliefangle="45 Angle" airgapwidth=0.254
PolygonConnect Polygon_F.Cu--12_ConnectRelief90 [IsNamedPolygon('F.Cu--12') vs (IsThruPin or IsSMTPin) and (PadShape_AllLayers <> 'Round')] p1188: connectstyle=Relief reliefconductorwidth=0.254 reliefentries=4 polygonreliefangle="90 Angle" airgapwidth=0.254
PolygonConnect Polygon_F.Cu--11_ConnectDirect [IsNamedPolygon('F.Cu--11') vs IsVia] p1189: connectstyle=Direct reliefconductorwidth=0.254 reliefentries=4 polygonreliefangle="90 Angle" airgapwidth=0.254
PolygonConnect Polygon_F.Cu--11_ConnectRelief45 [IsNamedPolygon('F.Cu--11') vs (IsThruPin or IsSMTPin) and (PadShape_AllLayers = 'Round')] p1190: connectstyle=Relief reliefconductorwidth=0.254 reliefentries=4 polygonreliefangle="45 Angle" airgapwidth=0.254
PolygonConnect Polygon_F.Cu--11_ConnectRelief90 [IsNamedPolygon('F.Cu--11') vs (IsThruPin or IsSMTPin) and (PadShape_AllLayers <> 'Round')] p1191: connectstyle=Relief reliefconductorwidth=0.254 reliefentries=4 polygonreliefangle="90 Angle" airgapwidth=0.254
PolygonConnect Polygon_F.Cu--10_ConnectDirect [IsNamedPolygon('F.Cu--10') vs IsVia] p1192: connectstyle=Direct reliefconductorwidth=0.254 reliefentries=4 polygonreliefangle="90 Angle" airgapwidth=0.254
PolygonConnect Polygon_F.Cu--10_ConnectRelief45 [IsNamedPolygon('F.Cu--10') vs (IsThruPin or IsSMTPin) and (PadShape_AllLayers = 'Round')] p1193: connectstyle=Relief reliefconductorwidth=0.254 reliefentries=4 polygonreliefangle="45 Angle" airgapwidth=0.254
PolygonConnect Polygon_F.Cu--10_ConnectRelief90 [IsNamedPolygon('F.Cu--10') vs (IsThruPin or IsSMTPin) and (PadShape_AllLayers <> 'Round')] p1194: connectstyle=Relief reliefconductorwidth=0.254 reliefentries=4 polygonreliefangle="90 Angle" airgapwidth=0.254
PolygonConnect Polygon_F.Cu--9_ConnectDirect [IsNamedPolygon('F.Cu--9') vs IsVia] p1195: connectstyle=Direct reliefconductorwidth=0.254 reliefentries=4 polygonreliefangle="90 Angle" airgapwidth=0.254
PolygonConnect Polygon_F.Cu--9_ConnectRelief45 [IsNamedPolygon('F.Cu--9') vs (IsThruPin or IsSMTPin) and (PadShape_AllLayers = 'Round')] p1196: connectstyle=Relief reliefconductorwidth=0.254 reliefentries=4 polygonreliefangle="45 Angle" airgapwidth=0.254
PolygonConnect Polygon_F.Cu--9_ConnectRelief90 [IsNamedPolygon('F.Cu--9') vs (IsThruPin or IsSMTPin) and (PadShape_AllLayers <> 'Round')] p1197: connectstyle=Relief reliefconductorwidth=0.254 reliefentries=4 polygonreliefangle="90 Angle" airgapwidth=0.254
PolygonConnect Polygon_F.Cu--8_ConnectDirect [IsNamedPolygon('F.Cu--8') vs IsVia] p1198: connectstyle=Direct reliefconductorwidth=0.254 reliefentries=4 polygonreliefangle="90 Angle" airgapwidth=0.254
PolygonConnect Polygon_F.Cu--8_ConnectRelief45 [IsNamedPolygon('F.Cu--8') vs (IsThruPin or IsSMTPin) and (PadShape_AllLayers = 'Round')] p1199: connectstyle=Relief reliefconductorwidth=0.5 reliefentries=4 polygonreliefangle="45 Angle" airgapwidth=0.5
PolygonConnect Polygon_F.Cu--8_ConnectRelief90 [IsNamedPolygon('F.Cu--8') vs (IsThruPin or IsSMTPin) and (PadShape_AllLayers <> 'Round')] p1200: connectstyle=Relief reliefconductorwidth=0.5 reliefentries=4 polygonreliefangle="90 Angle" airgapwidth=0.5
PolygonConnect Polygon_F.Cu--7_ConnectDirect [IsNamedPolygon('F.Cu--7') vs IsVia] p1201: connectstyle=Direct reliefconductorwidth=0.254 reliefentries=4 polygonreliefangle="90 Angle" airgapwidth=0.254
PolygonConnect Polygon_F.Cu--7_ConnectRelief45 [IsNamedPolygon('F.Cu--7') vs (IsThruPin or IsSMTPin) and (PadShape_AllLayers = 'Round')] p1202: connectstyle=Relief reliefconductorwidth=0.254 reliefentries=4 polygonreliefangle="45 Angle" airgapwidth=0.254
PolygonConnect Polygon_F.Cu--7_ConnectRelief90 [IsNamedPolygon('F.Cu--7') vs (IsThruPin or IsSMTPin) and (PadShape_AllLayers <> 'Round')] p1203: connectstyle=Relief reliefconductorwidth=0.254 reliefentries=4 polygonreliefangle="90 Angle" airgapwidth=0.254
PolygonConnect Polygon_F.Cu--6_ConnectDirect [IsNamedPolygon('F.Cu--6') vs IsVia] p1204: connectstyle=Direct reliefconductorwidth=0.254 reliefentries=4 polygonreliefangle="90 Angle" airgapwidth=0.254
PolygonConnect Polygon_F.Cu--6_ConnectRelief45 [IsNamedPolygon('F.Cu--6') vs (IsThruPin or IsSMTPin) and (PadShape_AllLayers = 'Round')] p1205: connectstyle=Relief reliefconductorwidth=0.254 reliefentries=4 polygonreliefangle="45 Angle" airgapwidth=0.254
PolygonConnect Polygon_F.Cu--6_ConnectRelief90 [IsNamedPolygon('F.Cu--6') vs (IsThruPin or IsSMTPin) and (PadShape_AllLayers <> 'Round')] p1206: connectstyle=Relief reliefconductorwidth=0.254 reliefentries=4 polygonreliefangle="90 Angle" airgapwidth=0.254
PolygonConnect Polygon_F.Cu--5_ConnectDirect [IsNamedPolygon('F.Cu--5') vs IsVia] p1207: connectstyle=Direct reliefconductorwidth=0.254 reliefentries=4 polygonreliefangle="90 Angle" airgapwidth=0.254
PolygonConnect Polygon_F.Cu--5_ConnectRelief45 [IsNamedPolygon('F.Cu--5') vs (IsThruPin or IsSMTPin) and (PadShape_AllLayers = 'Round')] p1208: connectstyle=Relief reliefconductorwidth=0.254 reliefentries=4 polygonreliefangle="45 Angle" airgapwidth=0.254
PolygonConnect Polygon_F.Cu--5_ConnectRelief90 [IsNamedPolygon('F.Cu--5') vs (IsThruPin or IsSMTPin) and (PadShape_AllLayers <> 'Round')] p1209: connectstyle=Relief reliefconductorwidth=0.254 reliefentries=4 polygonreliefangle="90 Angle" airgapwidth=0.254
PolygonConnect Polygon_F.Cu--4_ConnectDirect [IsNamedPolygon('F.Cu--4') vs IsVia] p1210: connectstyle=Direct reliefconductorwidth=0.254 reliefentries=4 polygonreliefangle="90 Angle" airgapwidth=0.254
PolygonConnect Polygon_F.Cu--4_ConnectRelief45 [IsNamedPolygon('F.Cu--4') vs (IsThruPin or IsSMTPin) and (PadShape_AllLayers = 'Round')] p1211: connectstyle=Relief reliefconductorwidth=0.254 reliefentries=4 polygonreliefangle="45 Angle" airgapwidth=0.254
PolygonConnect Polygon_F.Cu--4_ConnectRelief90 [IsNamedPolygon('F.Cu--4') vs (IsThruPin or IsSMTPin) and (PadShape_AllLayers <> 'Round')] p1212: connectstyle=Relief reliefconductorwidth=0.254 reliefentries=4 polygonreliefangle="90 Angle" airgapwidth=0.254
PolygonConnect Polygon_F.Cu--3_ConnectDirect [IsNamedPolygon('F.Cu--3') vs IsVia] p1213: connectstyle=Direct reliefconductorwidth=0.254 reliefentries=4 polygonreliefangle="90 Angle" airgapwidth=0.254